# Altium PCB TMP-001.PcbDoc
Units mil, origin at the board's own origin, x right, y up, seen from the top; angles counter-clockwise.
Board outline 1750 x 1750 mil, 2 copper layers (Top Layer, Bottom Layer), stack 62.8 mil thick; 6 components, 32 nets, 260 pads, 0 vias.
Unrouted connection lines stored in the file: 191.
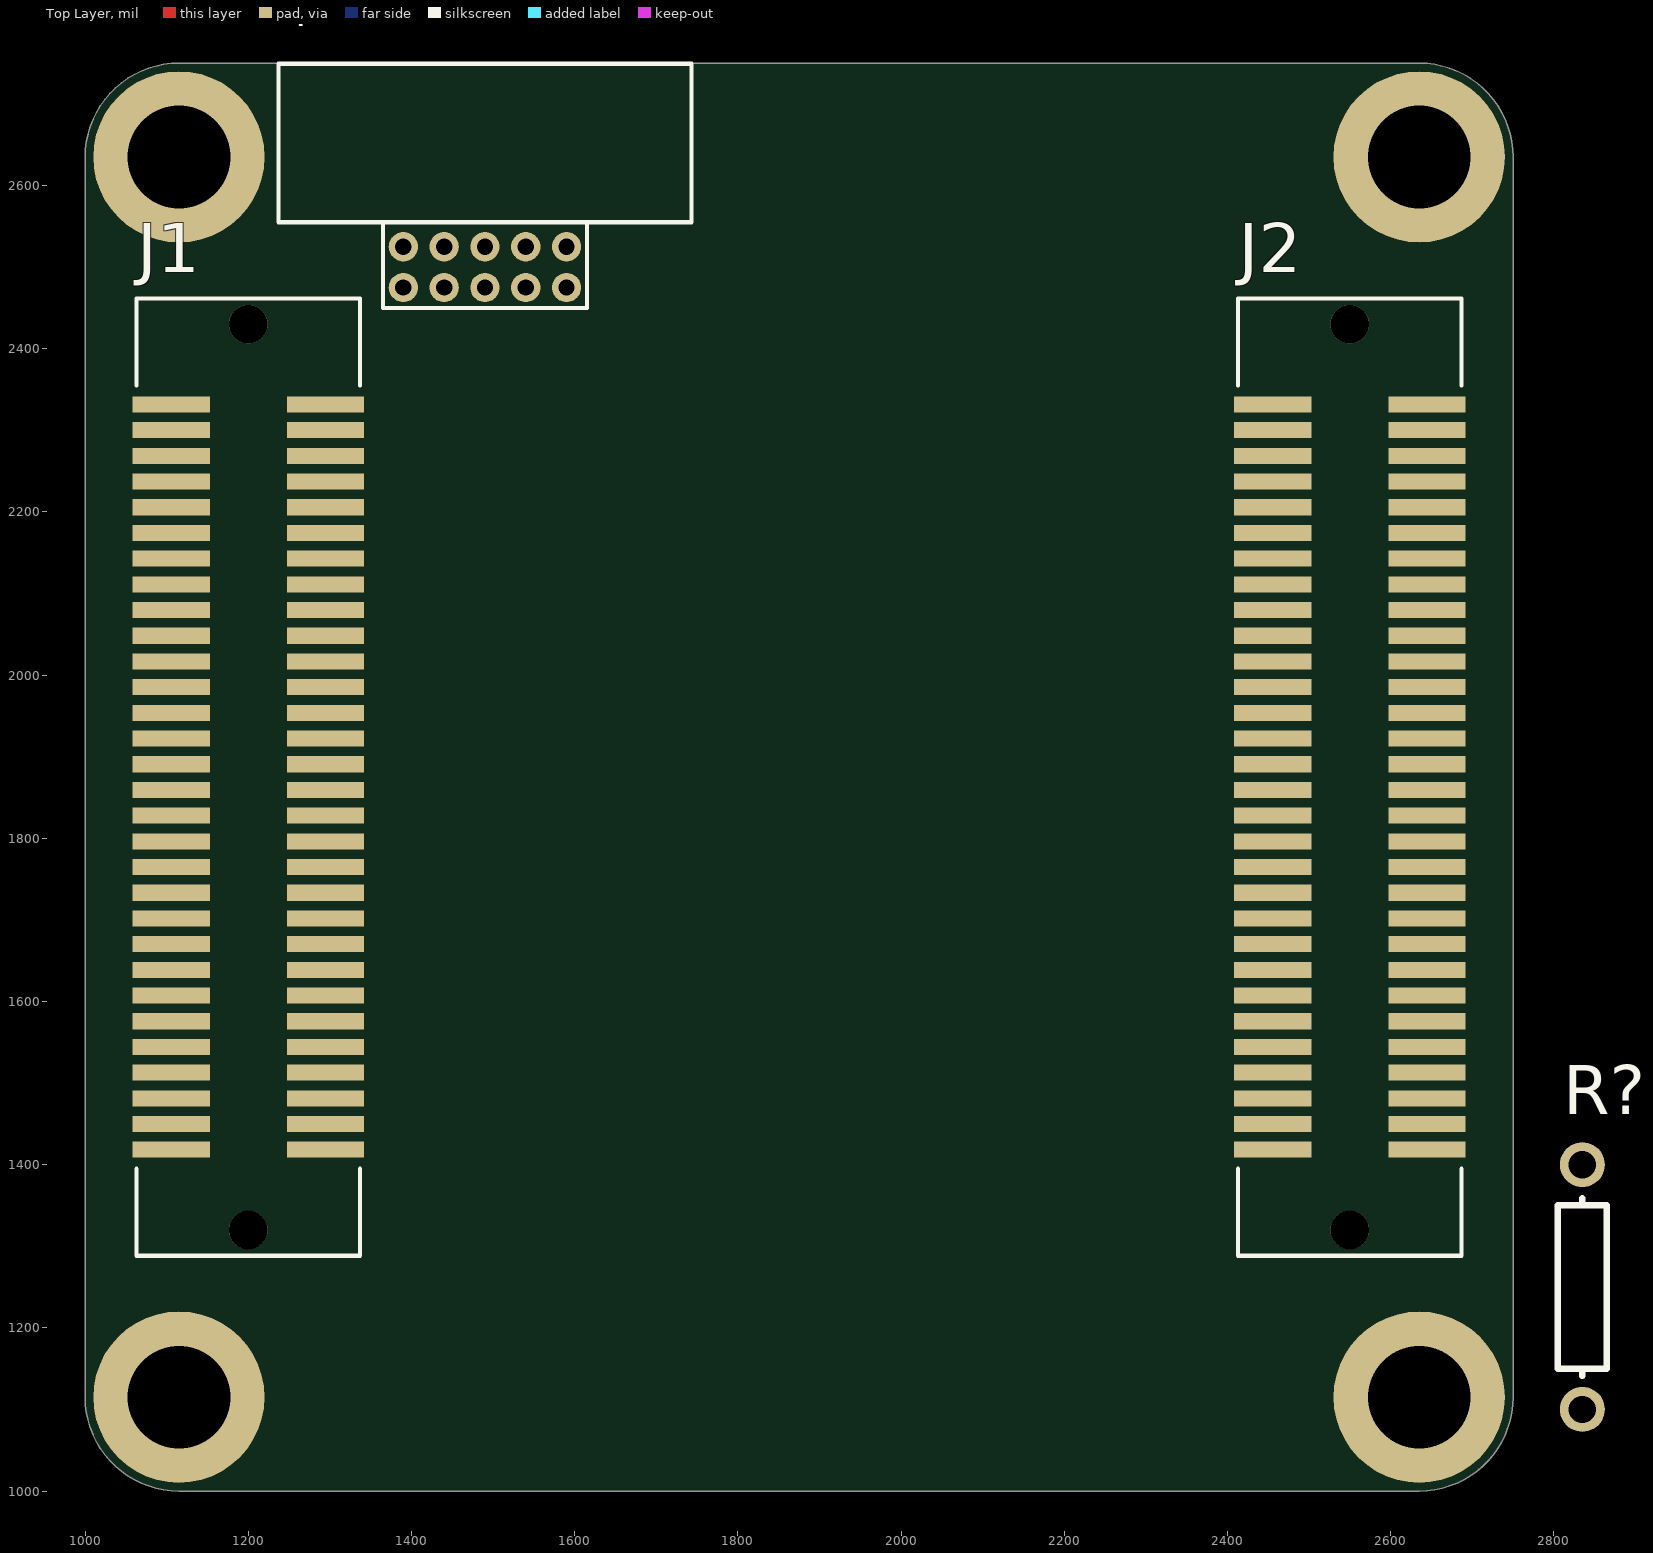
[diagram p0: Top Layer view]
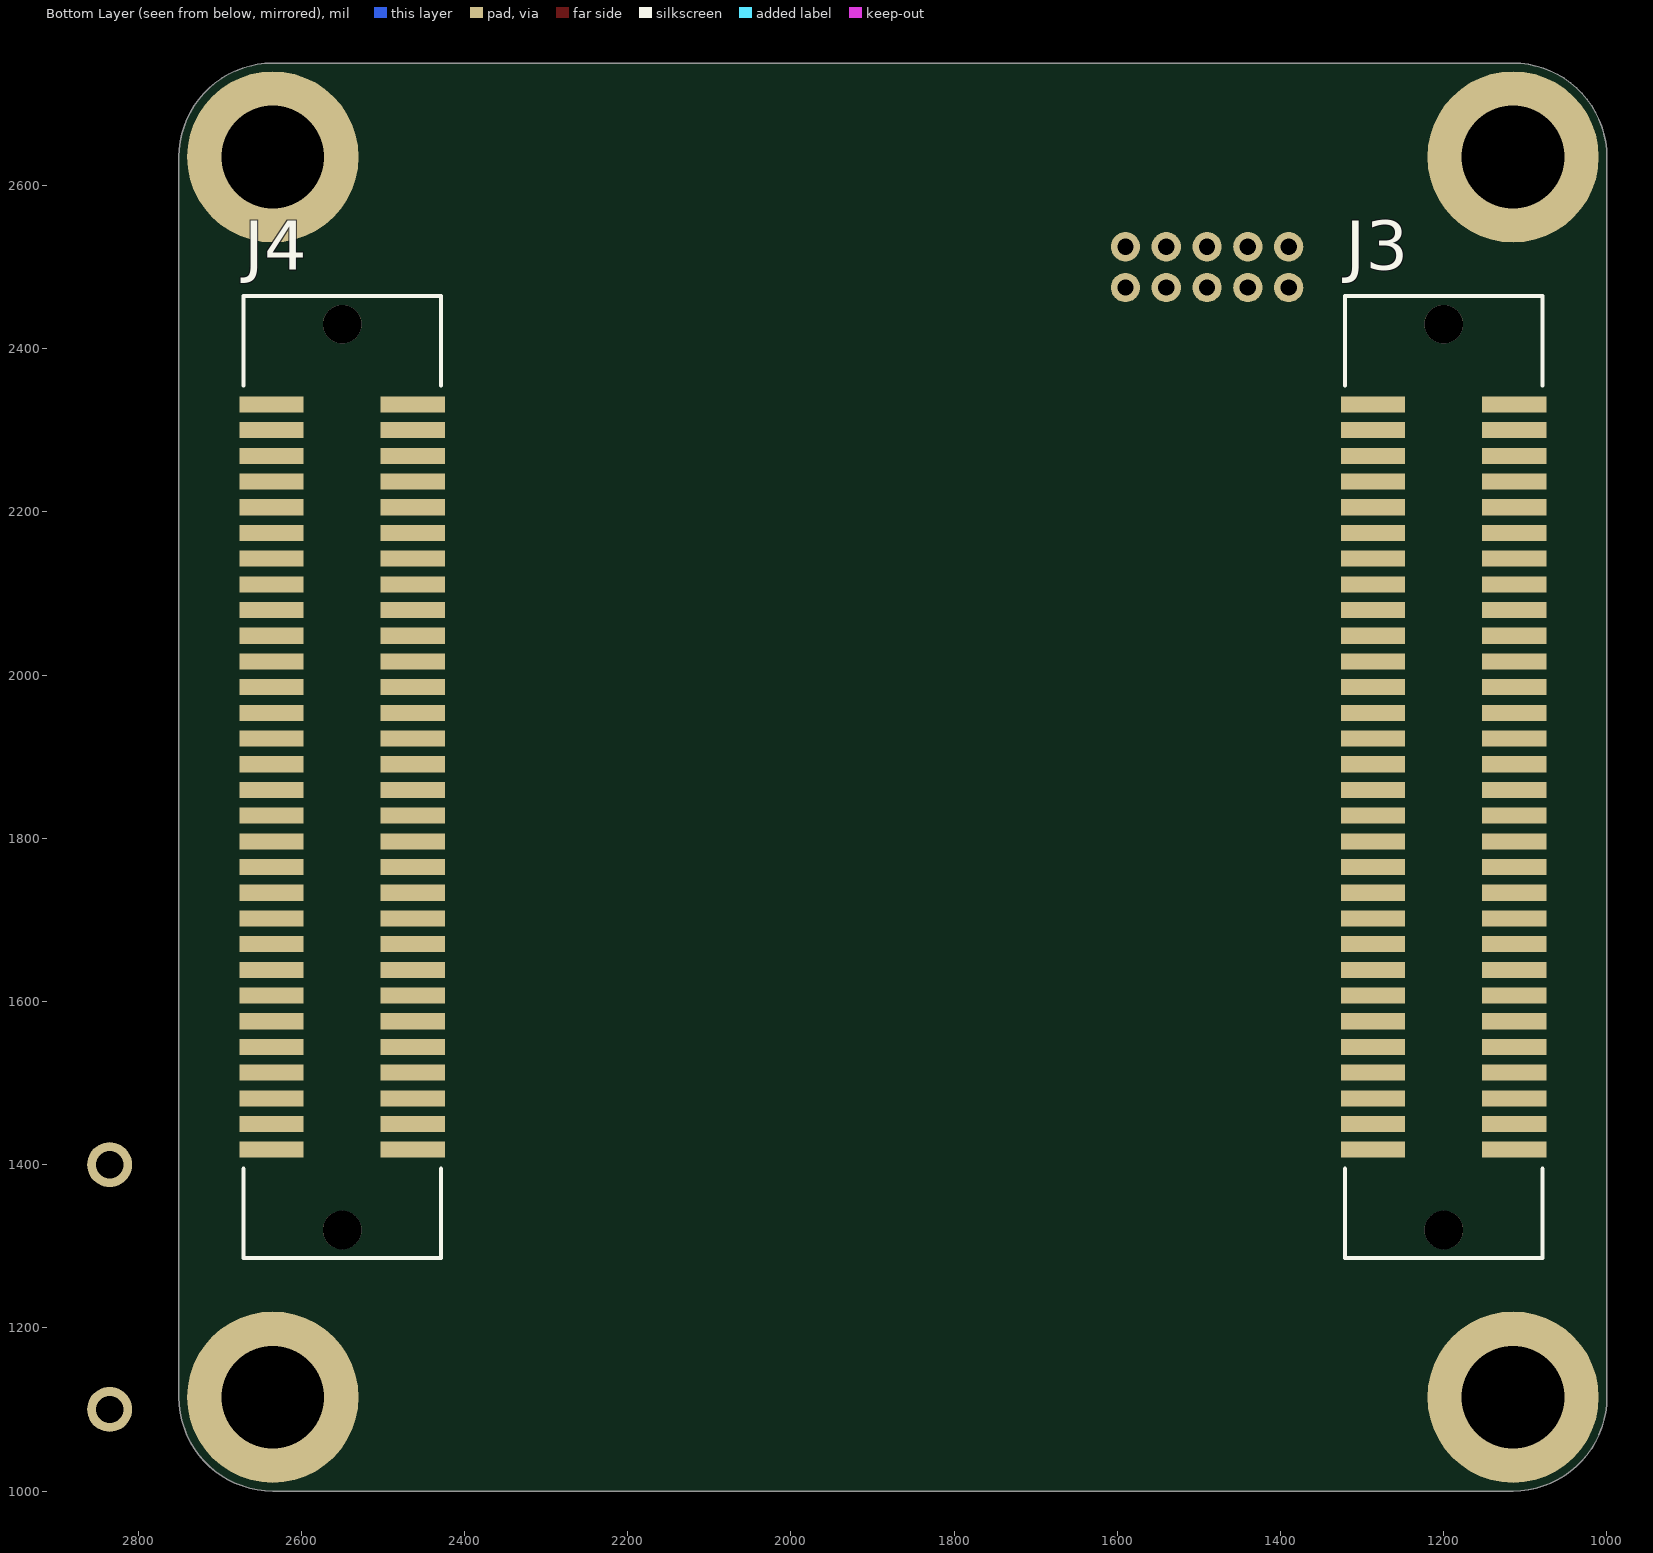
[diagram p1: Bottom Layer view, seen from below]

## Layer stack, top to bottom
Top Solder: solder mask 1, Solder Resist, Dk 3.5
Top Layer: signal copper 1.4
Dielectric 1: core 60, FR-4, Dk 4.6
Bottom Layer: signal copper 1.4
Bottom Solder: solder mask 1, Solder Resist, Dk 3.5

## Board outline
1000,1115 1000,2635 cw(c1115,2635) 1115,2750 2635,2750 cw(c2635,2635) 2750,2635 2750,1115 cw(c2635,1115) 2635,1000 1115,1000 cw(c1115,1115)

## Design rules (kind name [scope] priority, off if disabled: settings)
AssemblyTestPointUsage AssemblyTestPointUsage_1 [All] p2:
AssemblyTestpoint AssemblyTestpoint_1 [All] p2: testpointundercomponent=TRUE minsize=40 maxsize=100 preferedsize=60 minholesize=0 maxholesize=40 preferedholesize=32 testpointgrid=1 usegrid=TRUE gridtolerance=0.01 allowsidetop=TRUE allowsidebottom=TRUE
Clearance [All] p1: gap=10 ignorepadtopadclearanceinfootprint=FALSE except(0: Arc-Hole Track-Hole SMDPad-Hole THPad-Hole Via-Hole Fill-Hole Poly-Hole Region-Hole Text-Hole)
Clearance Clearance_1 [All] p2: gap=10 ignorepadtopadclearanceinfootprint=FALSE except(0: Arc-Hole Track-Hole SMDPad-Hole THPad-Hole Via-Hole Fill-Hole Poly-Hole Region-Hole Text-Hole)
ComponentClearance ComponentClearance_1 [All] p2: gap=10 collisioncheckmode=3 verticalgap=10 showdistances=FALSE
DiffPairsRouting [All] p1: maxlimit=10 minlimit=10 mostfreqgap=10 toplayer_minwidth=15 toplayer_maxwidth=15 toplayer_prefwidth=15 bottomlayer_minwidth=15 bottomlayer_maxwidth=15 bottomlayer_prefwidth=15 maxuncoupledlength=500
DiffPairsRouting DiffPairsRouting_1 [All] p2: maxlimit=10 minlimit=10 mostfreqgap=10 toplayer_minwidth=15 toplayer_maxwidth=15 toplayer_prefwidth=15 bottomlayer_minwidth=15 bottomlayer_maxwidth=15 bottomlayer_prefwidth=15 maxuncoupledlength=500
FabricationTestPointUsage FabricationTestPointUsage_1 [All] p2: valid=0 allowmultiple=FALSE
FabricationTestpoint FabricationTestpoint_1 [All] p2: side=3 testpointundercomponent=TRUE minsize=40 maxsize=100 preferedsize=60 minholesize=0 maxholesize=40 preferedholesize=32 testpointgrid=1 allowsidetop=TRUE allowsidebottom=TRUE usegrid=TRUE gridtolerance=0.01
FanoutControl Fanout_LCC [IsLCC] p1: bgadir=Out bgaviamode=Centered fanoutstyle=Auto fanoutdirection=Alternating viagrid=1 // Fanout_LCC (Default Rule)
FanoutControl Fanout_BGA [IsBGA] p2: bgadir=Out bgaviamode=Centered fanoutstyle=Auto fanoutdirection=Alternating viagrid=1 // Fanout_BGA (Default Rule)
FanoutControl Fanout_Default [All] p4: bgadir=Out bgaviamode=Centered fanoutstyle=Auto fanoutdirection=Alternating viagrid=1 // Fanout_Default (Default Rule)
FanoutControl Fanout_Small [(CompPinCount < 5)] p5: bgadir=Out bgaviamode=Centered fanoutstyle=Auto fanoutdirection=OutThenIn viagrid=1 // Fanout_Small (Default Rule)
FanoutControl Fanout_BGA_1 [IsBGA] p6: bgadir=Out bgaviamode=Centered fanoutstyle=Auto fanoutdirection=Alternating viagrid=1 // Fanout_BGA (Default Rule)
FanoutControl Fanout_LCC_1 [IsLCC] p7: bgadir=Out bgaviamode=Centered fanoutstyle=Auto fanoutdirection=Alternating viagrid=1 // Fanout_LCC (Default Rule)
FanoutControl Fanout_SOIC_1 [IsSOIC] p8: bgadir=Out bgaviamode=Centered fanoutstyle=Auto fanoutdirection=Alternating viagrid=1 // Fanout_SOIC (Default Rule)
FanoutControl Fanout_Small_1 [(CompPinCount < 5)] p9: bgadir=Out bgaviamode=Centered fanoutstyle=Auto fanoutdirection=OutThenIn viagrid=1 // Fanout_Small (Default Rule)
FanoutControl Fanout_Default_1 [All] p10: bgadir=Out bgaviamode=Centered fanoutstyle=Auto fanoutdirection=Alternating viagrid=1 // Fanout_Default (Default Rule)
Height Height_1 [All] p2: minheight=0 maxheight=1000 prefheight=500
HoleSize HoleSize_1 [All] p2: absolutevalues=TRUE maxlimit=100 minlimit=1 maxpercent=80.000 minpercent=20.000
HoleToHoleClearance HoleToHoleClearance_1 [All] p2: gap=10 allowstackedmicrovias=TRUE
LayerPairs LayerPairs_1 [All] p2: enforce=TRUE
MinimumSolderMaskSliver MinimumSolderMaskSliver_1 [All] p2: minsoldermaskwidth=3.5
NetAntennae NetAntennae_1 [All] p2: netantennaetolerance=0
PasteMaskExpansion PasteMaskExpansion_1 [All] p2: expansion=0
PlaneClearance PlaneClearance_1 [All] p2: clearance=20
PlaneConnect PlaneConnect_1 [All] p2: planeconnectstyle=Relief reliefexpansion=20 reliefentries=4 reliefconductorwidth=10 reliefairgap=10
PolygonConnect [All] p1: connectstyle=Relief reliefconductorwidth=10 reliefentries=4 polygonreliefangle="90 Angle" airgapwidth=10
PolygonConnect PolygonConnect_1 [All] p2: connectstyle=Relief reliefconductorwidth=10 reliefentries=4 polygonreliefangle="90 Angle" airgapwidth=10
RoutingCorners RoutingCorners_1 [All] p2: cornerstyle=45-Degree minsetback=100 maxsetback=100
RoutingLayers RoutingLayers_1 [All] p2: top layer_v5=TRUE bottom layer_v5=TRUE
RoutingPriority RoutingPriority_1 [All] p2: routingpriority=0
RoutingTopology RoutingTopology_1 [All] p2: topology=Shortest
RoutingVias [All] p1: holewidth=28 width=50 viastyle="Through Hole" minholewidth=28 minwidth=50 maxholewidth=28 maxwidth=50
RoutingVias RoutingVias_1 [All] p2: holewidth=28 width=50 viastyle="Through Hole" minholewidth=28 minwidth=50 maxholewidth=28 maxwidth=50
ShortCircuit ShortCircuit_1 [All] p2: allowed=FALSE
SilkToBoardRegionClearance SilkToBoardRegionClearance_1 [All] p2:
SilkToSilkClearance SilkToSilkClearance_1 [All] p2: silktosilkclearance=10
SilkToSolderMaskClearance SilkToSolderMaskClearance_1 [IsPad] p2: minsilkscreentomaskgap=10 clearancetoexposedcopper=TRUE
SolderMaskExpansion [All] p1: expansion=4 istentingtop=FALSE
SolderMaskExpansion SolderMaskExpansion_1 [All] p2: expansion=4 istentingtop=FALSE
UnRoutedNet UnRoutedNet_1 [All] p2:
UnpouredPolygon UnpouredPolygon_1 [All] p2:
Width [All] p1: maxlimit=10 minlimit=10 preferedwidth=10
Width Width_1 [All] p2: maxlimit=10 minlimit=10 preferedwidth=10
25 further rules are at their usual default settings.

## Classes and differential pairs
differential pair CAN0: +CAN0_P -CAN0_N

## Components (designator, comment, footprint, x,y, rotation, side; value= is the part's Value field where it differs from the comment)
* "2x5_0.05_SWD" 2x5_0.05_R 1490,2475 r180 top
J1 "10144517-06" 10144517-062802LF 1200,1875 r90 top locked
J2 "10144517-06" 10144517-062802LF 2550,1875 r90 top locked
J3 "10144518-06" 10144518-064802LF 1200,1875 r270 bottom locked
J4 "10144518-06" 10144518-064802LF 2550,1875 r270 bottom locked
R? "Res1" AXIAL-0.3 2835,1250 r90 top

## Footprints (in the part's own frame and the unit in brackets; to place one, negate y for a bottom-side part, rotate by r counter-clockwise, add the part's x,y. Pads: shape width x height; smd on the part's side, far side on the other; paste and mask are expansions set on the pad)
2x5_0.05_R [mil]
  round 36 hole 20: 1(100,0) 2(100,-50) 3(50,0) 4(50,-50) 5(0,0) 6(0,-50) 8(-50,-50) 9(-100,0) 10(-100,-50)
  round 36 hole 20 mask+4: 7(-50,0)
  silkscreen extent -253,-274 253,25, body extent -250,-274 250,8, height 198
10144517-062802LF [mm]
  rect 0.5x2.4 smd: 1(11.6,2.4) 2(11.6,-2.4) 3(10.8,2.4) 4(10.8,-2.4) 5(10,2.4) 6(10,-2.4) 7(9.2,2.4) 8(9.2,-2.4) 9(8.4,2.4) 10(8.4,-2.4) 11(7.6,2.4) 12(7.6,-2.4) 13(6.8,2.4) 14(6.8,-2.4) 15(6,2.4) 16(6,-2.4) 17(5.2,2.4) 18(5.2,-2.4) 19(4.4,2.4) 20(4.4,-2.4) 21(3.6,2.4) 22(3.6,-2.4) 23(2.8,2.4) 24(2.8,-2.4) 25(2,2.4) 26(2,-2.4) 27(1.2,2.4) 28(1.2,-2.4) 29(0.4,2.4) 30(0.4,-2.4) 31(-0.4,2.4) 32(-0.4,-2.4) 33(-1.2,2.4) 34(-1.2,-2.4) 35(-2,2.4) 36(-2,-2.4) 37(-2.8,2.4) 38(-2.8,-2.4) 39(-3.6,2.4) 40(-3.6,-2.4) 41(-4.4,2.4) 42(-4.4,-2.4) 43(-5.2,2.4) 44(-5.2,-2.4) 45(-6,2.4) 46(-6,-2.4) 47(-6.8,2.4) 48(-6.8,-2.4) 49(-7.6,2.4) 50(-7.6,-2.4) 51(-8.4,2.4) 52(-8.4,-2.4) 53(-9.2,2.4) 54(-9.2,-2.4) 55(-10,2.4) 56(-10,-2.4) 57(-10.8,2.4) 58(-10.8,-2.4) 59(-11.6,2.4) 60(-11.6,-2.4)
  round 1.2 hole 1.2 unplated: M1(14.1,0)
  silkscreen extent -14.9,-3.47 14.9,3.47, body extent -14.9,-3.4 14.9,3.4, height 7.65
10144518-064802LF [mm]
  rect 0.5x2 smd: 1(-11.6,2.2) 2(-11.6,-2.2) 3(-10.8,2.2) 4(-10.8,-2.2) 5(-10,2.2) 6(-10,-2.2) 7(-9.2,2.2) 8(-9.2,-2.2) 9(-8.4,2.2) 10(-8.4,-2.2) 11(-7.6,2.2) 12(-7.6,-2.2) 13(-6.8,2.2) 14(-6.8,-2.2) 15(-6,2.2) 16(-6,-2.2) 17(-5.2,2.2) 18(-5.2,-2.2) 19(-4.4,2.2) 20(-4.4,-2.2) 21(-3.6,2.2) 22(-3.6,-2.2) 23(-2.8,2.2) 24(-2.8,-2.2) 25(-2,2.2) 26(-2,-2.2) 27(-1.2,2.2) 28(-1.2,-2.2) 29(-0.4,2.2) 30(-0.4,-2.2) 31(0.4,2.2) 32(0.4,-2.2) 33(1.2,2.2) 34(1.2,-2.2) 35(2,2.2) 36(2,-2.2) 37(2.8,2.2) 38(2.8,-2.2) 39(3.6,2.2) 40(3.6,-2.2) 41(4.4,2.2) 42(4.4,-2.2) 43(5.2,2.2) 44(5.2,-2.2) 45(6,2.2) 46(6,-2.2) 47(6.8,2.2) 48(6.8,-2.2) 49(7.6,2.2) 50(7.6,-2.2) 51(8.4,2.2) 52(8.4,-2.2) 53(9.2,2.2) 54(9.2,-2.2) 55(10,2.2) 56(10,-2.2) 57(10.8,2.2) 58(10.8,-2.2) 59(11.6,2.2) 60(11.6,-2.2)
  round 1.2 hole 1.2 unplated: M2(14.1,0)
  silkscreen extent -14.97,-3.08 14.97,3.08, body extent -14.9,-3 14.9,3, height 7.65
AXIAL-0.3 [mm] "Axial Device, Thru-Hole; 2 Leads; 0.3 in Pin Spacing"
  round 1.4 hole 0.85: 1(-3.81,0) 2(3.81,0)
  silkscreen extent -2.77,-0.76 2.77,0.76

## Part data
R?: "Resistor"

## Free pads (board coordinates)
  round 210 hole 125.98: 0(1115,1115) 0(1115,2635) 0(2635,1115) 0(2635,2635)

## Nets (pads, with @x,y where several pads share a name; then routed paths per layer and width w, separated by ;. In a path a pad name is that pad's centre, name@x,y a point inside that pad or via, vN(x,y) a via of type N, cw(c..) or ccw(c..) an arc to the next point about the centre after c; other vN are vias at no path point)
+0.9V_REF: J1.42 J3.42
+3.3V: 
+5V: J1.46 J1.48 J1.50 J1.52 J1.54 J1.56 J1.58 J1.60 J3.46 J3.48 J3.50 J3.52 J3.54 J3.56 J3.58 J3.60
+5V_BOOTSTRAP: J1.44 J3.44
+12V: J2.1 J2.3 J2.5 J2.7 J2.9 J2.11 J2.13 J2.15 J2.17 J2.19 J4.1 J4.3 J4.5 J4.7 J4.9 J4.11 J4.13 J4.15 J4.17 J4.19
+VBAT: J2.21 J2.23 J2.25 J2.27 J2.29 J2.31 J2.33 J2.35 J2.37 J2.39 J2.41 J2.43 J2.45 J2.47 J2.49 J2.51 J2.53 J2.55 J2.57 J2.59 J4.21 J4.23 J4.25 J4.27 J4.29 J4.31 J4.33 J4.35 J4.37 J4.39 J4.41 J4.43 J4.45 J4.47 J4.49 J4.51 J4.53 J4.55 J4.57 J4.59
CAN0_H: J1.4 J1.10
CAN0_L: J1.6 J1.12
CAN0_N: J3.6 J3.12 R?.1
CAN0_P: J3.4 J3.10 R?.2
CAN0_RX: 
CAN0_STBY: 
CAN0_TX: 
CTRL_SYNC: J1.25 J3.25
DETECT_A: J1.31
DETECT_B: J3.31
DRAIN: J1.1 J1.2 J1.7 J1.8 J1.14 J1.19 J1.23 J1.27 J1.39 J1.40 J3.1 J3.2 J3.7 J3.8 J3.14 J3.19 J3.23 J3.27 J3.39 J3.40
EN_0: J1.33 J3.33
EN_1: J1.35 J3.35
EN_2: J1.37 J3.37
GND: J1.43 J1.45 J1.47 J1.49 J1.51 J1.53 J1.55 J1.57 J1.59 J2.2 J2.4 J2.6 J2.8 J2.10 J2.12 J2.14 J2.16 J2.18 J2.20 J2.22 J2.24 J2.26 J2.28 J2.30 J2.32 J2.34 J2.36 J2.38 J2.40 J2.42 J2.44 J2.46 J2.48 J2.50 J2.52 J2.54 J2.56 J2.58 J2.60 J3.43 J3.45 J3.47 J3.49 J3.51 J3.53 J3.55 J3.57 J3.59 J4.2 J4.4 J4.6 J4.8 J4.10 J4.12 J4.14 J4.16 J4.18 J4.20 J4.22 J4.24 J4.26 J4.28 J4.30 J4.32 J4.34 J4.36 J4.38 J4.40 J4.42 J4.44 J4.46 J4.48 J4.50 J4.52 J4.54 J4.56 J4.58 J4.60
I2C_SCL: J1.5 J3.5
I2C_SDA: J1.3 J3.3
NetC?_2: 
P_GOOD: J1.29 J3.29
PPS: J1.21 J3.21
QSPI_CLK: J1.9 J3.9
QSPI_IO0: J1.11 J3.11
QSPI_IO1: J1.13 J3.13
QSPI_IO2: J1.15 J3.15
QSPI_IO3: J1.17 J3.17
SYNC_0: J1.41 J3.41
pads on no net: *.1 *.2 *.3 *.4 *.5 *.6 *.7 *.8 *.9 *.10 J1.16 J1.18 J1.20 J1.22 J1.24 J1.26 J1.28 J1.30 J1.32 J1.34 J1.36 J1.38 J1.M1 J2.M1 J3.16 J3.18 J3.20 J3.22 J3.24 J3.26 J3.28 J3.30 J3.32 J3.34 J3.36 J3.38 J3.M2 J4.M2

## Silkscreen, mask and mechanical layers (free items; w line width, h text height)
Outline:
  the board outline again, w5